# EAGLE board power_NAND (EAGLE 8.6.3)
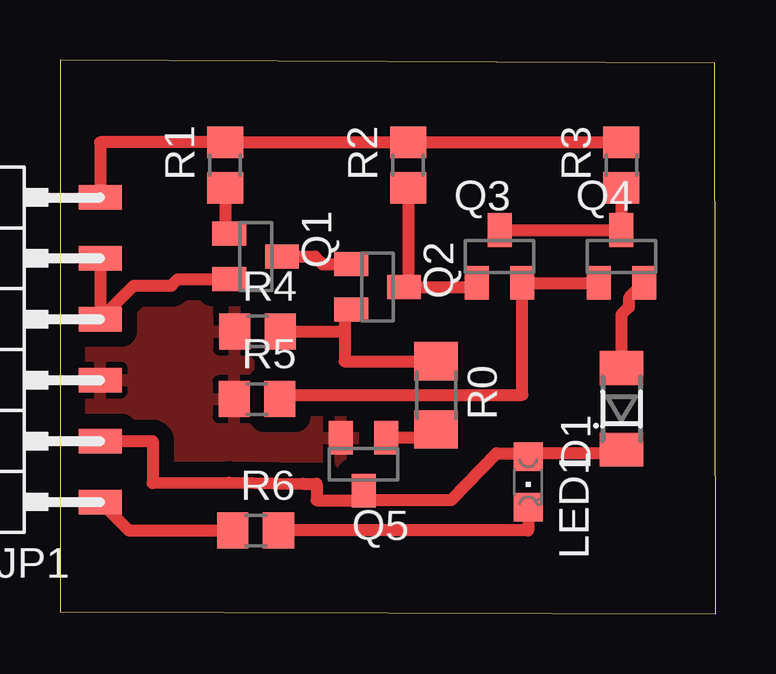
[diagram p0: board, top side]

Size 27.33 x 23.1 mm. Coordinates in mm from the lower left corner, seen from the top.
Outline: 0,0.1 27.33,0 27.28,22.98 0,23.1 0,0.1
Copper layers (1*16): Top 0.035mm / dielectric 1.5mm / Bottom 0.035mm
Design rules "default *": minimum track width 25mil, minimum drill 0.8mm, track to track 25mil, track to pad 20mil, pad to pad 20mil, via to via 20mil, smd to smd 20mil, copper to edge 40mil, drill to drill 6mil, minimum pad ring 20mil, minimum via ring 15mil, stop-mask expansion 4mil, vias tented up to drill 0mil, thermal gap 10mil

## Footprints (pad centres in the part's own frame; a part is rotated, then mirrored left to right if it is on the bottom)
SOD80_DO213AA_MINIMELF = smd 1.4 x 1.8: A 1.7,0; C -1.7,0
1X06SMD/90 = smd 1.016 x 1.778: 1 -1.27,-5.08; 2 1.27,-5.08; 3 3.81,-5.08; 4 6.35,-5.08; 5 8.89,-5.08; 6 11.43,-5.08
CHIPLED_0805 = smd 1.2 x 1.2: A 0,-1.05; C 0,1.05
SOT23 = smd 1 x 1.4: 1 -0.95,-1.1; 2 0.95,-1.1; 3 0,1.1
R1206 = smd 1.6 x 1.803: 1 -1.422,0; 2 1.422,0
R0805 = smd 1.3 x 1.5: 1 -0.95,0; 2 0.95,0

## Placement (x,y rotation side)
D1  LL4148  [SOD80_DO213AA_MINIMELF]  23.39,8.56 90 top
JP1  [1X06SMD/90]  -3.4,5.94 90 top
LED1  [CHIPLED_0805]  19.51,5.51 180 top
Q1  2n2222  [SOT23]  8.15,14.91 270 top
Q2  2n2222  [SOT23]  13.23,13.64 270 top
Q3  2n2222  [SOT23]  18.31,14.91 0 top
Q4  2n2222  [SOT23]  23.39,14.91 0 top
Q5  2n2222  [SOT23]  12.65,6.25 180 top
R0  0R  [R1206]  15.67,9.12 270 top
R1  4k  [R0805]  6.88,18.72 90 top
R2  500R  [R0805]  14.5,18.72 90 top
R3  100R  [R0805]  23.39,18.72 90 top
R4  1k  [R0805]  8.23,11.79 0 top
R5  4k  [R0805]  8.2,8.97 0 top
R6  470R  [R0805]  8.15,3.48 0 top

## Library data of the parts
D1 = _hhn_diodes_smd
JP1 = pinhead-2
LED1 = led
Q1-Q5 = semicon-smd-ipc
R0 R1-R6 = rcl; SPICEPREFIX: R

## Nets
+5V: JP1.6 R1.2 R2.2 R3.2
GND: JP1.3 Q5.2 R4.1 R5.1
N$2: Q1.1 R1.1
N$3: Q2.3 Q3.1 R2.1
N$4: Q2.2 R0.1 R4.2
N$5: Q3.3 Q4.3 R3.1
N$6: Q3.2 Q4.1 R5.2
N$7: D1.A Q4.2
N$9: JP1.4 JP1.5 Q1.2
POWER_ON: JP1.1 R6.1
S$2: Q5.1 R0.2
S$3: LED1.C R6.2
S$4: Q1.3 Q2.1
S$6: D1.C JP1.2 LED1.A Q5.3

## Tracks (layer width: path | path; a pad name or v marks a point on that pad's centre or on a via)
+5V
  Top 0.508: R3.2 R2.2 R1.2 1.68,19.67 JP1.6
GND
  pour Top: -1.37,23.8 -1.37,-0.97 29.11,-0.97 29.11,23.8
N$2
  Top 0.508: R1.1 6.88,16.03 Q1.1
N$3
  Top 0.508: R2.1 14.5,13.81 Q2.3 17.19,13.64 Q3.1
N$4
  Top 0.508: Q2.2 11.86,12.69 11.86,12.37 11.86,11.79 | R4.2 11.86,11.79 | 11.86,11.79 11.86,10.54 R0.1
N$5
  Top 0.508: Q3.3 Q4.3 R3.1
N$6
  Top 0.508: Q4.1 Q3.2 19.26,9.14 9.33,9.14 arc90 R5.2
N$7
  Top 0.508: D1.A 23.39,12.48 23.71,12.79 23.71,13.17 Q4.2
N$9
  Top 0.508: Q1.2 4.91,13.96 4.64,13.69 3.07,13.69 JP1.4 JP1.5
POWER_ON
  Top 0.508: JP1.1 2.87,3.48 R6.1
S$2
  Top 0.508: R0.2 15.67,7.35 Q5.1
S$3
  Top 0.508: LED1.C 19.51,3.48 R6.2
S$4
  Top 0.508: 9.41,14.76 Q1.3 10.62,14.91 10.94,14.59 Q2.1
S$6
  Top 0.508: D1.C 23.39,6.71 19.51,6.71 | 19.51,6.71 LED1.A | 19.51,6.71 18.19,6.71 16.28,4.75 12.65,4.75 | JP1.2 3.86,7.21 3.86,5.46 7.04,5.49 10.13,5.44 10.69,5.44 10.69,4.75 12.65,4.75 | 12.65,4.75 Q5.3